# Altium PCB H05R2x.PcbDoc (part 1 of 2)
Units mil, origin at the board's own origin, x right, y up, seen from the top; angles counter-clockwise.
Board outline 2362.2 x 1363.78 mil, 4 copper layers (Top Layer, Layer 1, Layer 2, Bottom Layer); 78 components, 39 nets, 191 pads, 39 vias.
Unrouted connection lines stored in the file: 1.
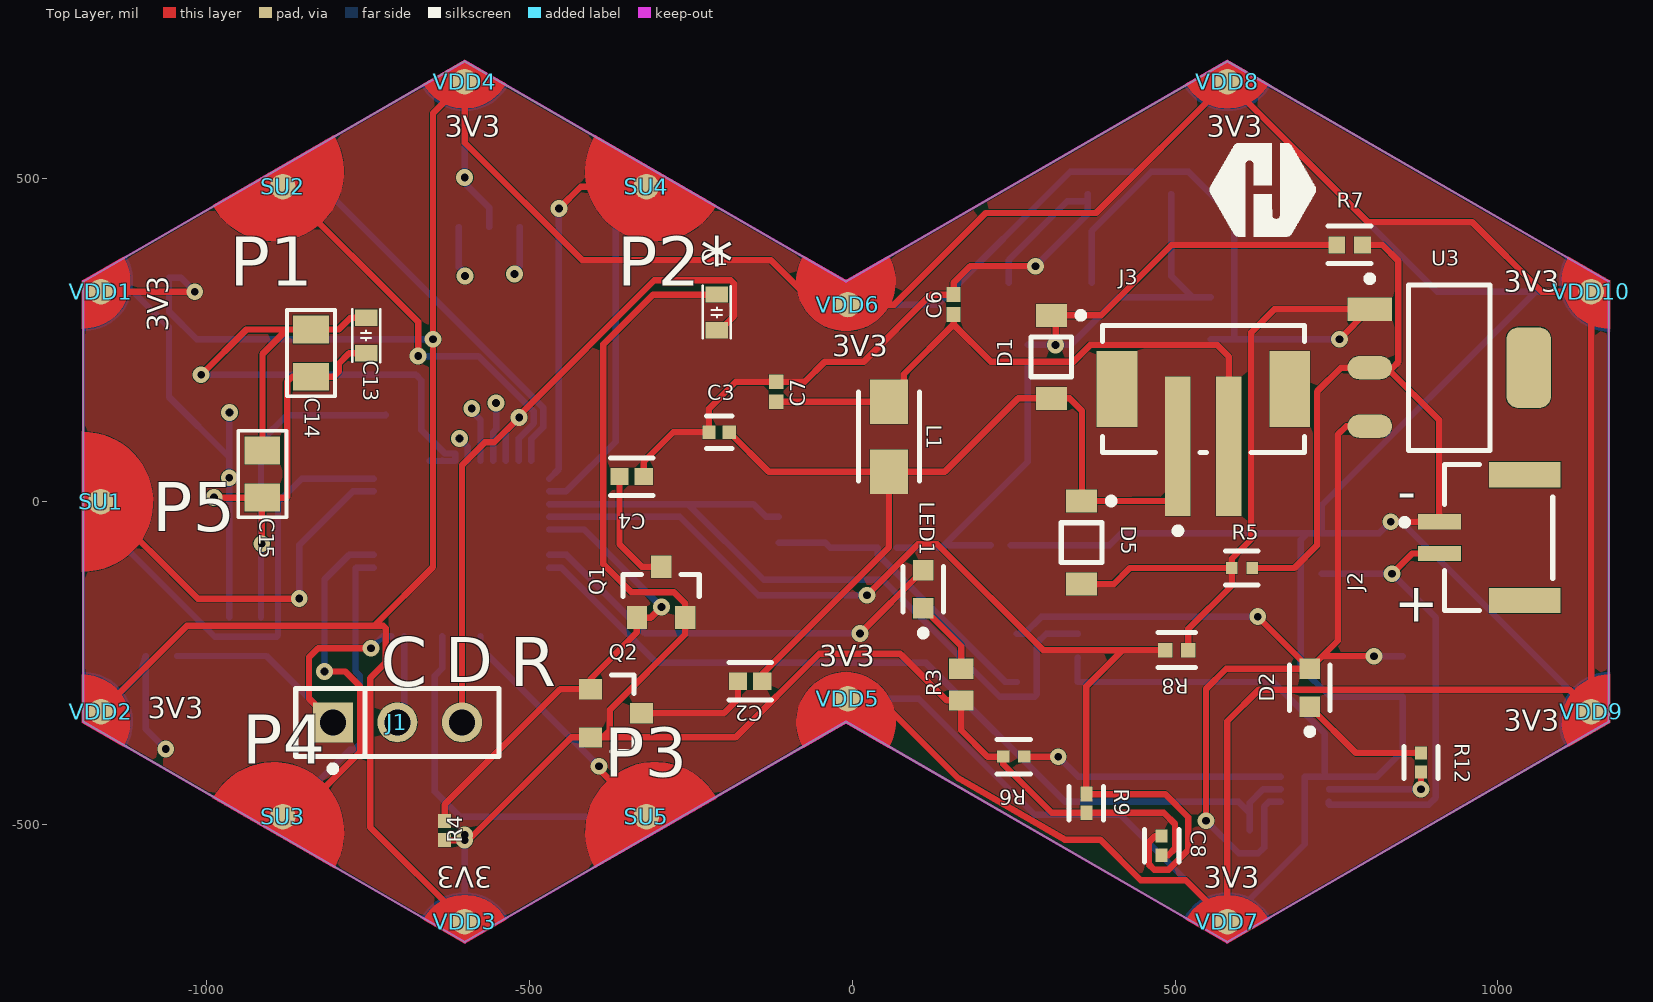
[diagram p0: Top Layer view]
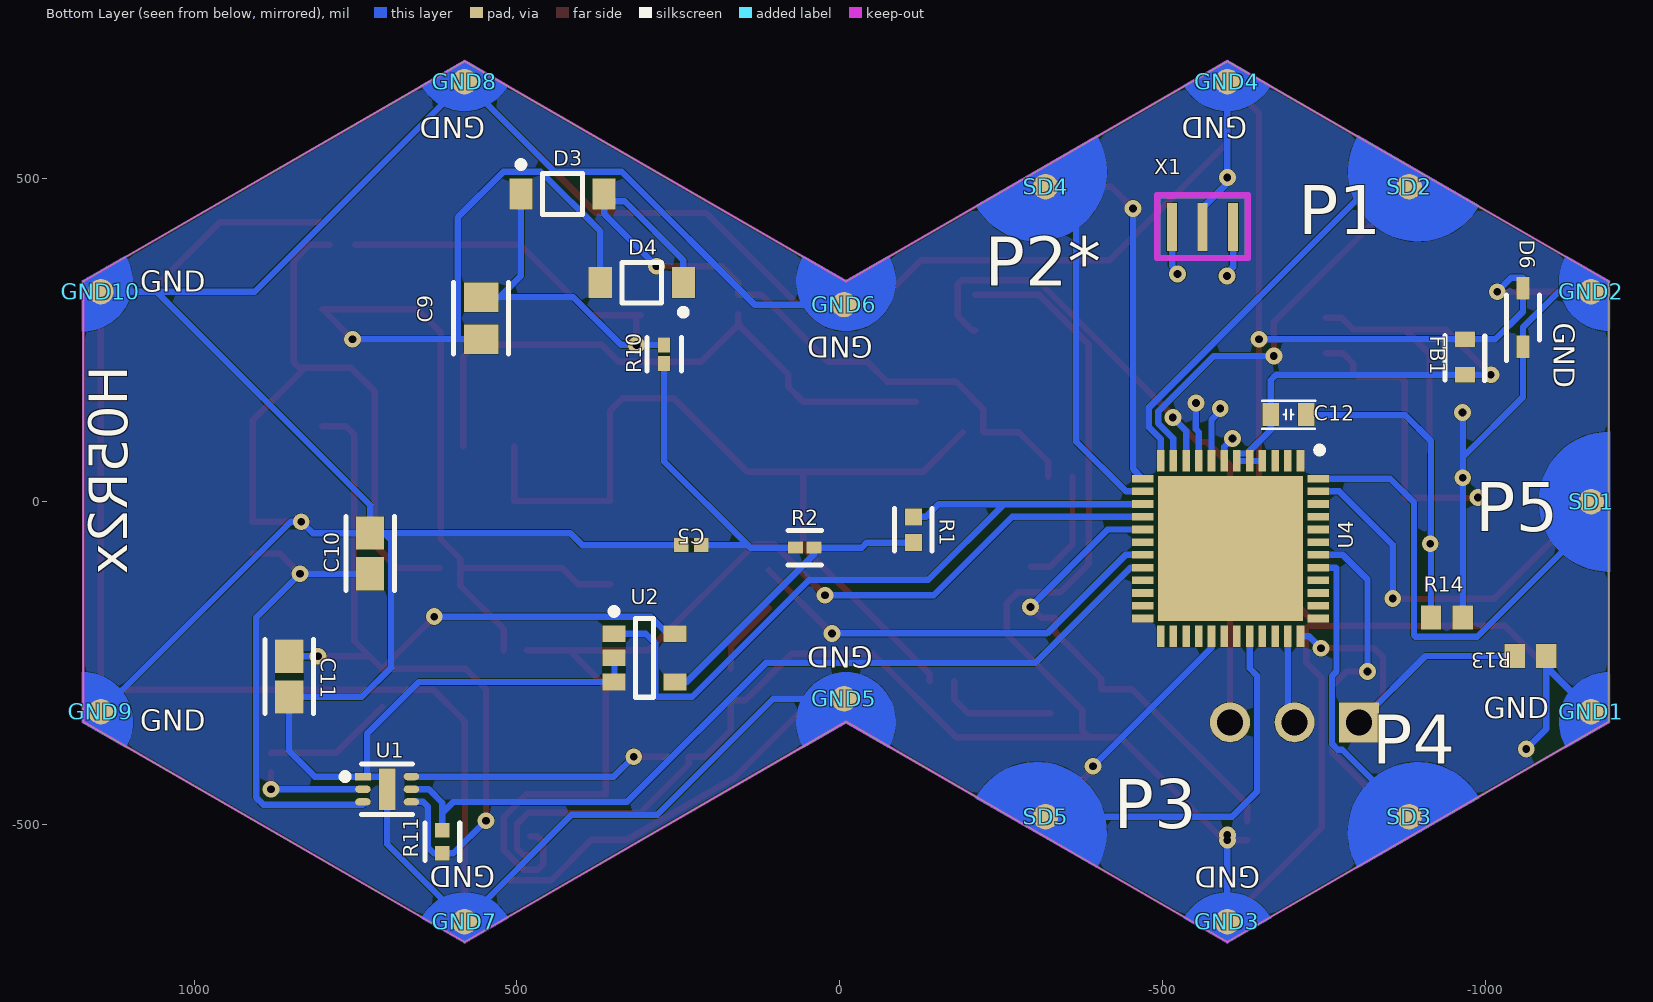
[diagram p1: Bottom Layer view, seen from below]
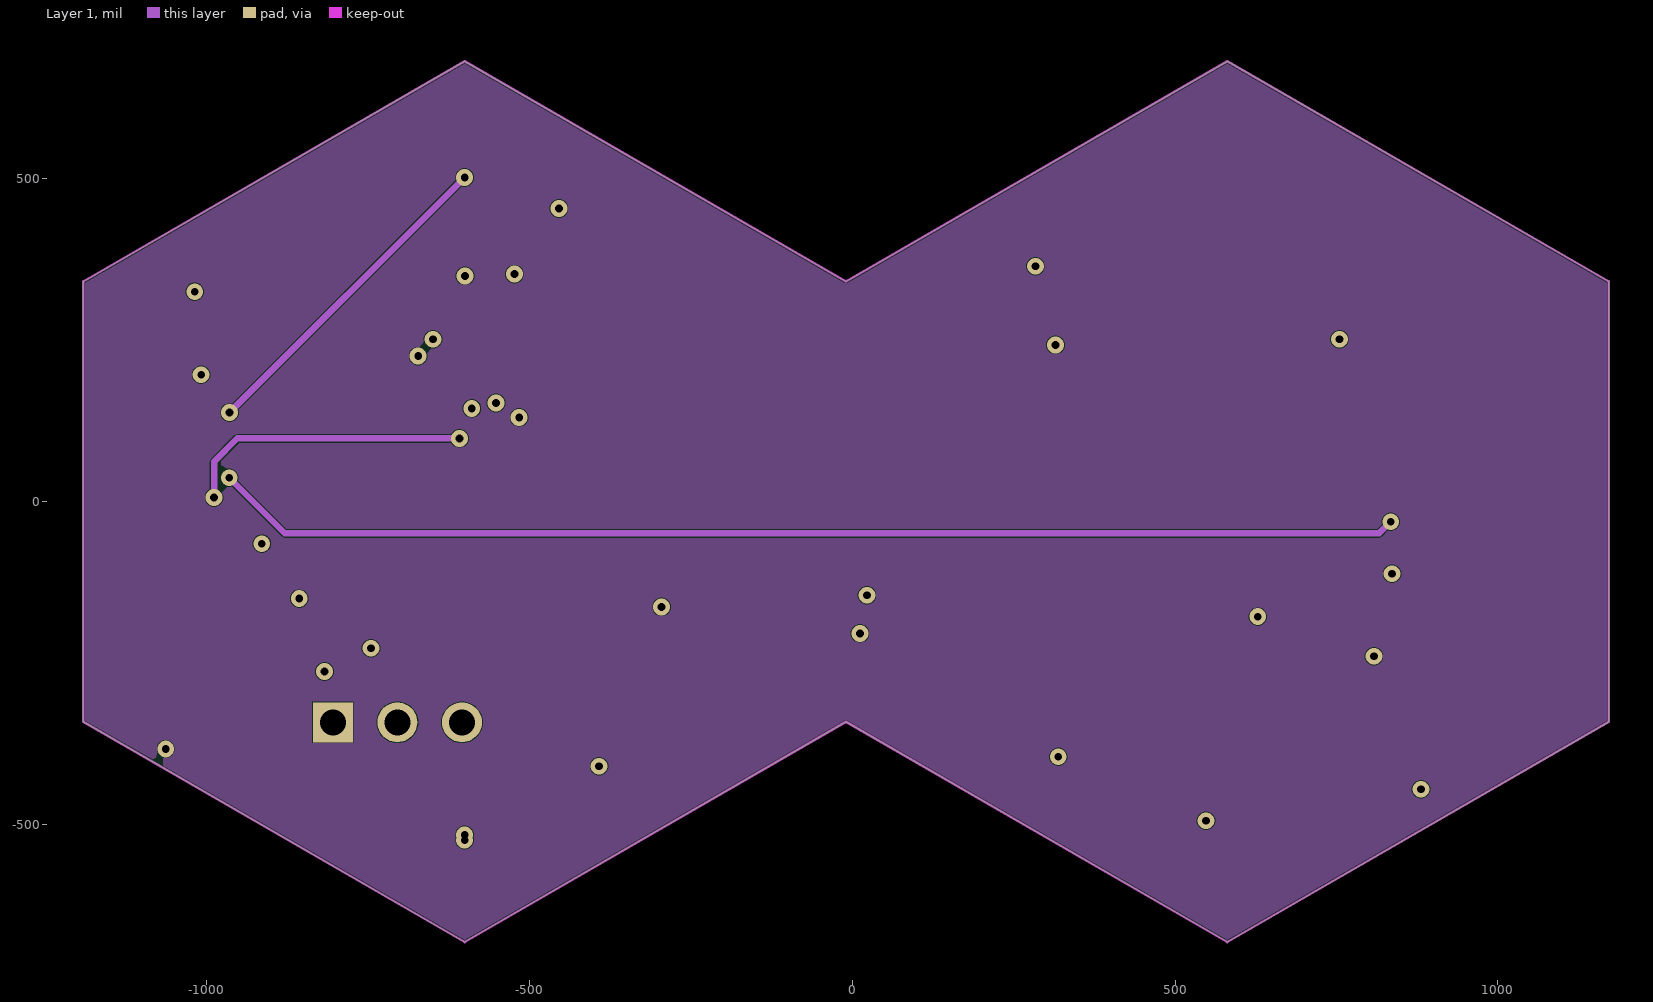
[diagram p2: Layer 1]
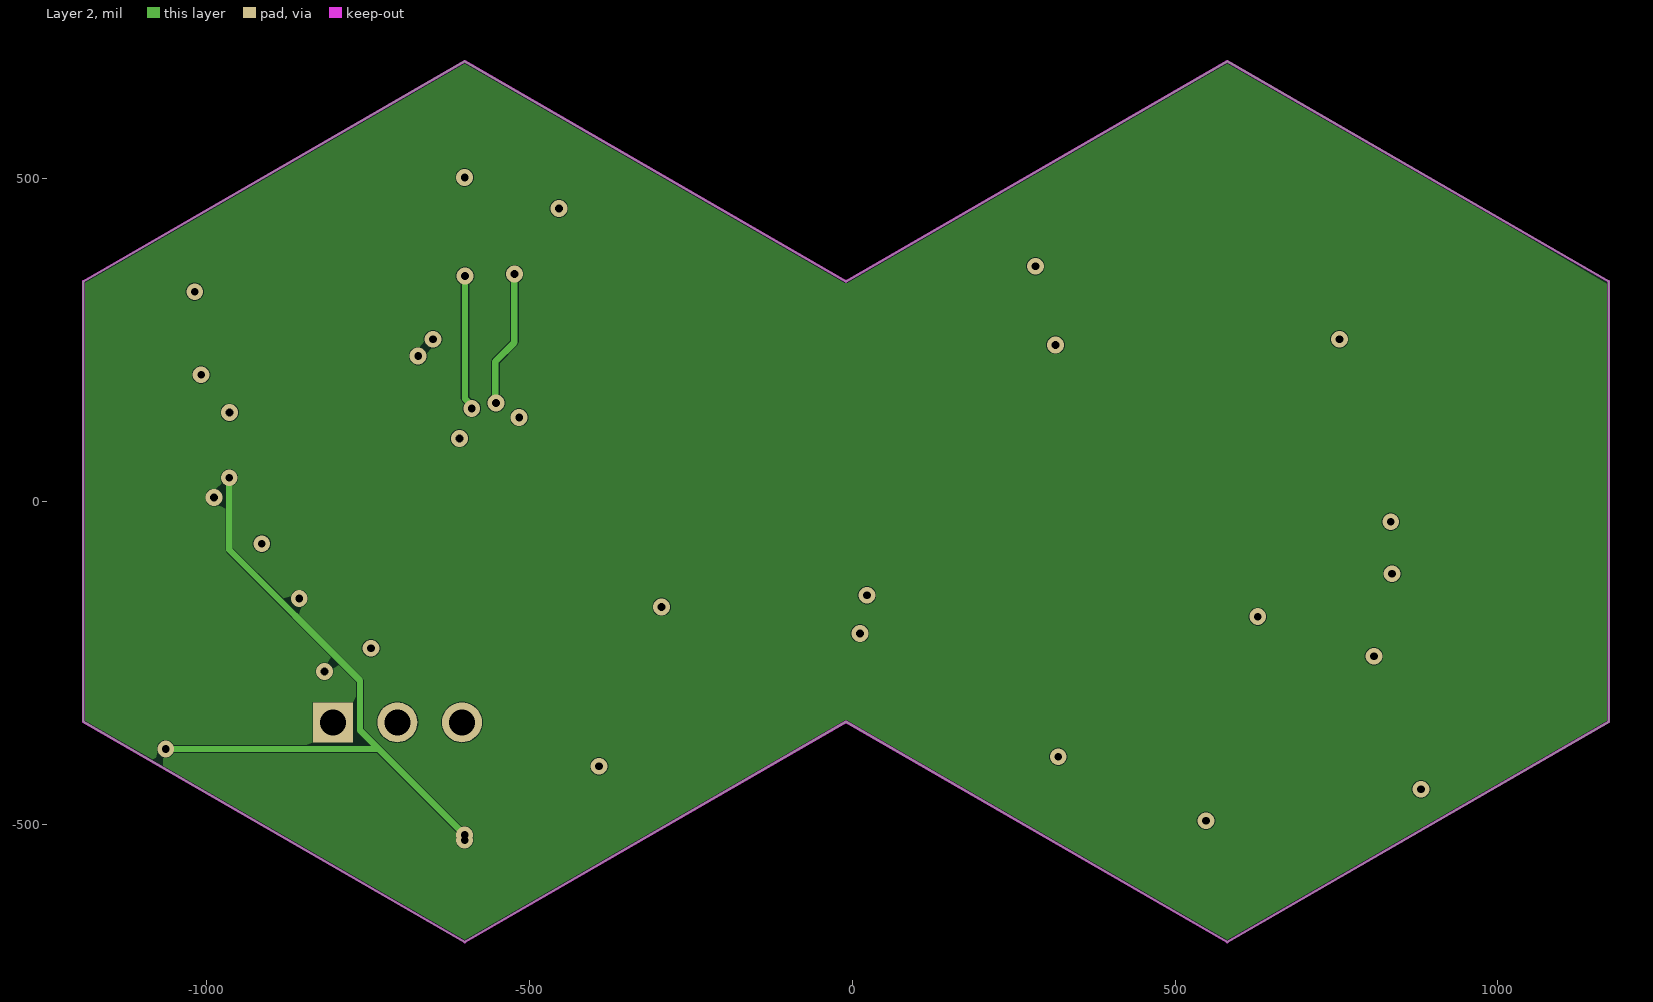
[diagram p3: Layer 2]
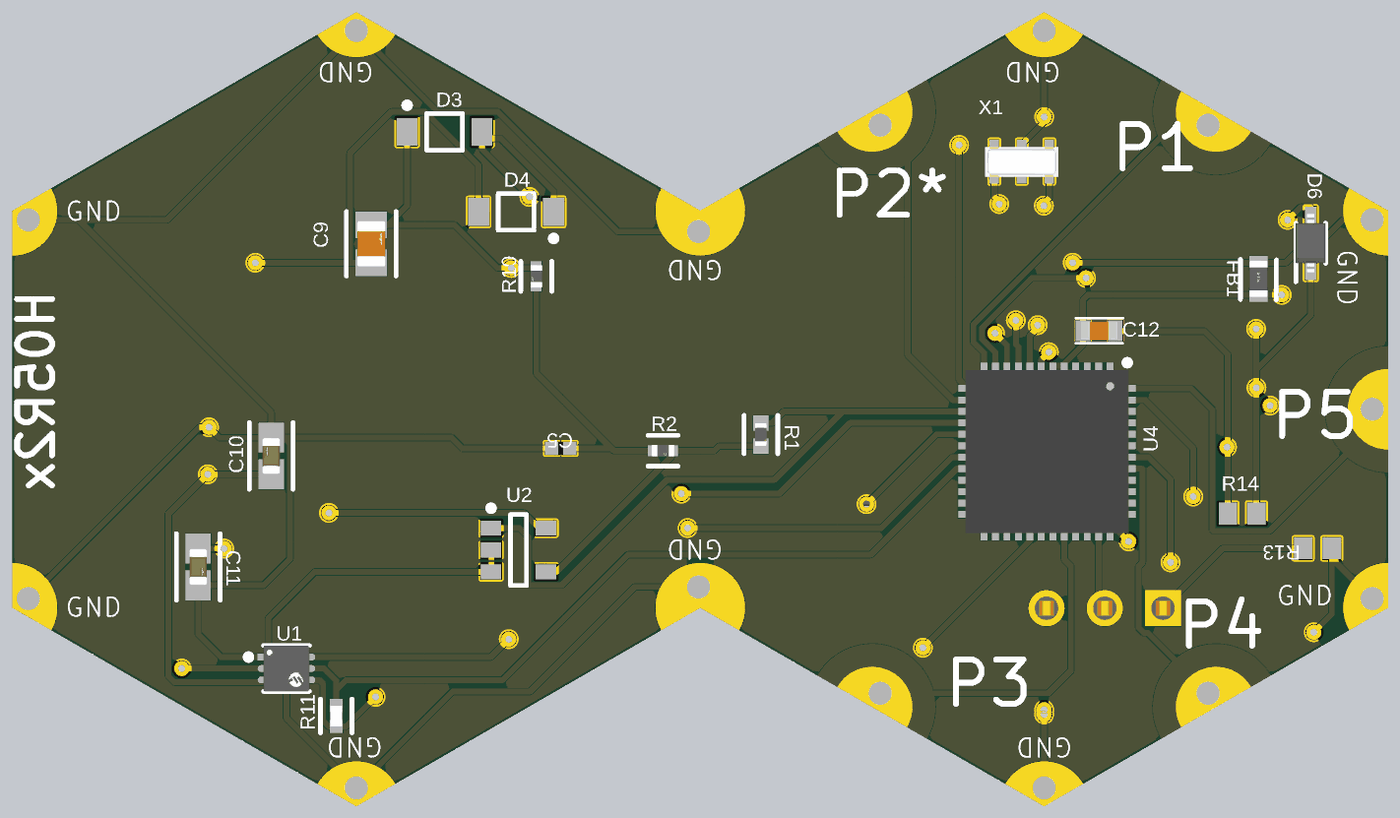
[diagram p4: 3D render of the assembled board from below, using the file's embedded part models]

## Layer stack, top to bottom
Top Solder: solder mask 0.4, Solder Resist, Dk 3.5
Top Layer: signal copper 1.4
Dielectric 2: dielectric 12.6, FR-4, Dk 4.8
Layer 1: signal copper 1.4
Dielectric 1: dielectric 12.6, FR-4, Dk 4.8
Layer 2: signal copper 1.4
Dielectric 3: dielectric 12.6, FR-4, Dk 4.8
Bottom Layer: signal copper 1.4
Bottom Solder: solder mask 0.4, Solder Resist, Dk 3.5

## Board outline
-1190.55,-340.94 -600,-681.89 -9.45,-340.94 581.1,-681.89 1171.65,-340.94 1171.65,340.94 581.1,681.89 -9.45,340.94 -600,681.89 -1190.55,340.94

## Design rules (kind name [scope] priority, off if disabled: settings)
Clearance [All] p1: gap=1 ignorepadtopadclearanceinfootprint=TRUE
PolygonConnect [All] p1: connectstyle=Relief reliefconductorwidth=10 reliefentries=4 polygonreliefangle="90 Angle" airgapwidth=10
RoutingVias [All] p1: holewidth=12 width=26 viastyle="Through Hole" minholewidth=12 minwidth=26 maxholewidth=12 maxwidth=26
SilkToSilkClearance [All] p1: silktosilkclearance=0.5
SilkToSolderMaskClearance [IsPad] p1: minsilkscreentomaskgap=5 clearancetoexposedcopper=TRUE
SolderMaskExpansion [All] p1: expansion=4 istentingtop=FALSE
SupplyNets "Schematic Supply Nets_5" [InNet('VREC')] p1: voltage=0.000
SupplyNets "Schematic Supply Nets_4" [InNet('+5')] p2: voltage=0.000
SupplyNets "Schematic Supply Nets_3" [InNet('GND')] p3: voltage=0.000
SupplyNets "Schematic Supply Nets_2" [InNet('VDDA')] p4: voltage=0.000
SupplyNets "Schematic Supply Nets_1" [InNet('VSSA')] p5: voltage=0.000
SupplyNets "Schematic Supply Nets" [InNet('VDD')] p6: voltage=0.000
Width [All] p1: maxlimit=10 minlimit=10 preferedwidth=10
28 further rules are at their usual default settings.

## Classes and differential pairs
component class "H05R2x_Frontend 1": C2 C3 C4 C5 C6 C7 C8 C9 C10 C11 D1 D2 D3 D4 D5 J2 J3 L1 Q1 Q2 R1 R2 R4 R5 R6 R7 R8 R9 R10 R11 R12 U1 U2 U3
component class H05R2x_Backend: C1 C12 C13 C14 C15 D6 FB1 GND1 GND2 GND3 GND4 GND5 GND6 GND7 GND8 GND9 GND10 J1 LED1 R3 R13 R14 SD1 SD2 SD3 SD4 SD5 SU1 SU2 SU3 SU4 SU5 U4 VDD1 VDD2 VDD3 VDD4 VDD5 VDD6 VDD7 VDD8 VDD9 VDD10 X1

## Components (designator, comment, footprint, x,y, rotation, side; value= is the part's Value field where it differs from the comment)
C1 "CL10B104KA8NNNC" C0603 -209.52,293.08 r270 top value=100nF
C2 "47pF  ±5% 100V 0402" FP-GQM155-0_05-IPC_A -157.98,-278.03 r180 top
C3 "470pF 50V 5% 0402" FP-C0402-BB-MFG -205.93,107.42 r0 top value="470 pF"
C4 "47pF  ±5% 100V 0402" FP-GQM155-0_05-IPC_A -341.35,38.73 r180 top
C5 "10nF 16V 0402" CAPC1005X60X26LL10T16 230.12,-67.26 r0 bottom
C6 "22pF 100V ±5% 0402" CAPC1005X61X26LL10T16 157.16,305.3 r90 top
C7 "22pF 100V ±5% 0402" CAPC1005X61X26LL10T16 -117.61,170.22 r90 top
C8 "1.0uF 10% 25V 0402" FP-GRM155-0_05-IPC_C 479.35,-532.67 r270 top
C9 "10uF 16V 10% 0402" FP-GRM21B-0_1-IPC_B 555.48,284.14 r90 bottom
C10 "4.7uF 10%, 16V 0603" FP-GRM188-0_2-IPC_A 727.33,-80.17 r90 bottom
C11 "4.7uF 10% 16V 0603" FP-GRM188-0_2-IPC_A 852.59,-270.78 r270 bottom
C12 "CL10B104KA8NNNC" C0603 -694.54,134.9 r0 bottom value=100nF
C13 "CL10B104KA8NNNC" C0603 -752.53,257.31 r90 top value=100nF
C14 "CL21X475KAQNNNE" C0805 -837.88,230.08 r270 top value=4.7µF
C15 "CC0805KKX7R7BB105" C0805 -913.1,42.8 r90 top value=1µF
D1 "MBR0540T1G" ONSC-SOD-123-2-425-04_V 308.5,224.18 r270 top
D2 "LED RED 0603" FP-6_541-5092_01-4-MFG 708.82,-288.13 r90 top
D3 "MBR0540T1G" ONSC-SOD-123-2-425-04_V 429.57,476.4 r180 bottom
D4 "MBR0540T1G" ONSC-SOD-123-2-425-04_V 306.71,339.01 r0 bottom
D5 "MBR0540T1G" ONSC-SOD-123-2-425-04_V 355.38,-63.33 r270 top
D6 "CDSOD323-T03SC" SOD2513X114N -1057.77,285.15 r90 bottom value=200pF
FB1 "MMZ1608Y300B" FP-MMZ1608-0_8-MFG -968.08,224.04 r270 bottom
GND1 "HEXABIT_UART_PORT" HEXABIT_POWER_PORT_D -1163.26,-325.2 r150 top
GND2 "HEXABIT_UART_PORT" HEXABIT_POWER_PORT_D -1163.26,325.2 r90 top
GND3 "HEXABIT_UART_PORT" HEXABIT_POWER_PORT_D -600,-650.39 r210 top
GND4 "HEXABIT_UART_PORT" HEXABIT_POWER_PORT_D -600,650.39 r30 top
GND5 "HEXABIT_UART_PORT" HEXABIT_POWER_PORT_D_300L -6.61,-305.2 r90 top
GND6 "HEXABIT_UART_PORT" HEXABIT_POWER_PORT_D_300R -6.61,305.2 r90 top
GND7 "HEXABIT_UART_PORT" HEXABIT_POWER_PORT_D 581.1,-650.39 r210 top
GND8 "HEXABIT_UART_PORT" HEXABIT_POWER_PORT_D 581.1,650.39 r30 top
GND9 "HEXABIT_UART_PORT" HEXABIT_POWER_PORT_D 1144.49,-325.2 r270 top
GND10 "HEXABIT_UART_PORT" HEXABIT_POWER_PORT_D 1144.49,325.2 r330 top
J1 "TSW-103-14-G-S" FP-TSW-103-14-G-S-MFG -704.08,-341.74 r0 top
J2 "BM02B-GHS-TBT(LF)(SN)" FP-BM02B-GHS-TBT_LF_SN-MFG 1001.24,-55.65 r90 top
J3 "B2B-PH-SM4-TBT(LF)(SN)" FP-B2B-PH-SM4-TBT_LF_SN-MFG 543.91,174.41 r0 top
L1 "47μH ±5% 10.4Ω 55mA 1206" FP-LQH31CN_03-MFG 57.06,100.71 r270 top
LED1 "VLMS1300-GS08" FP-6_541-5092_01-4-MFG 110.16,-135.53 r90 top
Q1 "2N7002-7-F" FP-SOT23-MFG -295.76,-140.13 r90 top
Q2 "2N7002-7-F" FP-SOT23-MFG -365.56,-327.67 r0 top
R1 "20kΩ, 1%, 0402" FP-TFCR0402-IPC_A -113.68,-43.5 r270 bottom
R2 "1kΩ ±1% 0402" FP-RNCP0402-IPC_C 54.45,-71.18 r0 bottom
R3 "Manufacturer Part Number" R0603 168.94,-283.17 r90 top value=270Ω
R4 "10kΩ, 1% 0402" RESC1005X40X25LL10T10 -631.01,-509.49 r90 top
R5 "1.2kΩ 1% 0402" FP-MCS0402-IPC_C 603.69,-102.69 r0 top
R6 "3.9kΩ ±1% 0402" FP-RN73R1E-IPC_C 250.15,-394.87 r180 top
R7 "0.1Ω 1% 0402" FP-CSR0402-IPC_A 770.25,397.69 r0 top
R8 "11kΩ 1% 0402" FP-CRCW0402-e3-IPC_B 502.89,-229.8 r180 top
R9 "1kΩ ±1% 0.1W 0402" FP-RNCP0402-IPC_C 362.7,-467.19 r270 top
R10 "1kΩ ±1% 0402" FP-RNCP0402-IPC_C 272.06,228.28 r90 bottom
R11 "11kΩ, 1%, 0402" FP-CRCW0402-e3-IPC_B 615.65,-526.84 r90 bottom
R12 "1kΩ ±1% 0402" FP-AC0402-IPC_C 880.91,-403.94 r270 top
R13 "Manufacturer Part Number" R0603 -1069.36,-238.97 r180 bottom value=10kΩ
R14 "Manufacturer Part Number" R0603 -939.95,-179.12 r0 bottom
SD1 "HEXABIT_UART_PORT" HEXABIT_UART_PORT_D -1163.39,0 r150 top
SD2 "HEXABIT_UART_PORT" HEXABIT_UART_PORT_D -881.5,487.8 r90 top
SD3 "HEXABIT_UART_PORT" HEXABIT_UART_PORT_D -881.5,-487.8 r210 top
SD4 "HEXABIT_UART_PORT" HEXABIT_UART_PORT_D -318.5,487.8 r30 top
SD5 "HEXABIT_UART_PORT" HEXABIT_UART_PORT_D -318.5,-487.8 r270 top
SU1 "HEXABIT_UART_PORT" HEXABIT_UART_PORT_U -1163.39,0 r150 top
SU2 "HEXABIT_UART_PORT" HEXABIT_UART_PORT_U -881.5,487.8 r90 top
SU3 "HEXABIT_UART_PORT" HEXABIT_UART_PORT_U -881.5,-487.8 r210 top
SU4 "HEXABIT_UART_PORT" HEXABIT_UART_PORT_U -318.5,487.8 r30 top
SU5 "HEXABIT_UART_PORT" HEXABIT_UART_PORT_U -318.5,-487.8 r270 top
U1 "MCP73830LT-0AAI/MYY" FP-C04-078-IPC_C 701.06,-445.31 r180 bottom
U2 "MCP6001T-E/OT" SOT-23-OT5_L 302.53,-241.82 r180 bottom
U3 "MCP1755ST-5002E/DB" FP-C04-032-IPC_B 924.68,207.43 r0 top
U4 "STM32G0B1CEU6" QFN50P700X700X65-49N-D -604.97,-72.6 r270 bottom
VDD1 "HEXABIT_UART_PORT" HEXABIT_POWER_PORT_U -1163.26,325.2 r150 top
VDD2 "HEXABIT_UART_PORT" HEXABIT_POWER_PORT_U -1163.26,-325.2 r210 top
VDD3 "HEXABIT_UART_PORT" HEXABIT_POWER_PORT_U -600,-650.39 r270 top
VDD4 "HEXABIT_UART_PORT" HEXABIT_POWER_PORT_U -600,650.39 r90 top
VDD5 "HEXABIT_UART_PORT" HEXABIT_POWER_PORT_U_300L -6.61,-305.2 r90 top
VDD6 "HEXABIT_UART_PORT" HEXABIT_POWER_PORT_U_300R -6.61,305.2 r90 top
VDD7 "HEXABIT_UART_PORT" HEXABIT_POWER_PORT_U 581.1,-650.39 r270 top
VDD8 "HEXABIT_UART_PORT" HEXABIT_POWER_PORT_U 581.1,650.39 r90 top
VDD9 "HEXABIT_UART_PORT" HEXABIT_POWER_PORT_U 1144.49,-325.2 r330 top
VDD10 "HEXABIT_UART_PORT" HEXABIT_POWER_PORT_U 1144.49,325.2 r30 top
X1 "CSTCE8M00G52Z-R0" XTALL_CSTCE8M00G52 -561.6,425.35 r90 bottom value=10pF

## Footprints (in the part's own frame and the unit in brackets; to place one, negate y for a bottom-side part, rotate by r counter-clockwise, add the part's x,y. Pads: shape width x height; smd on the part's side, far side on the other; paste and mask are expansions set on the pad)
C0603 [mm]
  rect 0.64x0.89 smd mask+0.05: 1(-0.7,0) 2(0.7,0)
  silkscreen extent -1.05,-0.55 1.02,0.55, body extent -0.9,-0.5 0.9,0.5, height 1.4
C0805 [mil]
  rect 43x55 smd: 1(-36.5,0) 2(36.5,0)
  silkscreen extent -67,-37 67,37, body extent -39,-24 40,25, height 31
CAPC1005X60X26LL10T16 [mm] "Chip Capacitor, 2-Leads, Body 1.00x0.50mm, IPC High Density"
  rect 0.58x0.54 smd: 1(-0.39,0) 2(0.39,0)
  body extent -0.55,-0.3 0.55,0.3, height 0.6
CAPC1005X61X26LL10T16 [mm] "Chip Capacitor, 2-Leads, Body 1.02x0.51mm, IPC High Density"
  rect 0.58x0.56 smd: 1(-0.39,0) 2(0.39,0)
  body extent -0.56,-0.31 0.56,0.31, height 0.61
FP-6_541-5092_01-4-MFG [mm]
  rect 0.8x0.8 smd paste+0 mask+0: 1(-0.75,0) 2(0.75,0)
  silkscreen extent -1.85,-0.8 0.9,0.8, body extent -1.25,-0.6 1.25,0.6, height 0.25
FP-AC0402-IPC_C [mil]
  rect 20.29x18.6 smd paste+0 mask+0: 1(-14.91,0) 2(14.9,0)
  silkscreen extent -25,-27 25,27, body extent -29,-15 29,15, height 10
FP-B2B-PH-SM4-TBT_LF_SN-MFG [mm]
  rect 1x5.5 smd paste+0 mask+0: 1(-1,-2.25) 2(1,-2.25)
  rect 1.6x3 smd paste+0 mask+0: 3(-3.4,0) 4(3.4,0)
  silkscreen extent -3.98,-5.7 3.98,2.5, body extent -4.3,-5.1 4.3,2.6, height 0.25
FP-BM02B-GHS-TBT_LF_SN-MFG [mm]
  rect 0.6x1.7 smd paste+0 mask+0: 1(0.625,2.325) 2(-0.625,2.325)
  rect 1x2.8 smd paste+0 mask+0: 3(-2.475,-1.025) 4(2.475,-1.025)
  silkscreen extent -2.87,-2.13 2.88,3.82, body extent -3.08,-2.52 3.08,3.27, height 0.25
FP-C04-032-IPC_B [mm]
  rect 1.754x0.913 smd paste+0 mask+0: 1(-3.125,2.3)
  rrect100% 1.754x0.913 smd paste+0 mask+0: 2(-3.125,0) 3(-3.125,-2.3)
  rrect52% 1.754x3.172 smd paste+0 mask+0: 4(3.125,0)
  silkscreen extent -3.25,-3.25 1.6,3.62
FP-C04-078-IPC_C [mm]
  rect 0.611x0.292 smd paste+0 mask+0: 1(-0.951,0.5)
  rrect100% 0.611x0.292 smd paste+0 mask+0: 2(-0.951,0) 3(-0.951,-0.5) 4(0.951,-0.5) 5(0.951,0) 6(0.951,0.5)
  rect 0.65x1.65 smd paste-1000 mask+0: 7(0,0)
  silkscreen extent -1.78,-1 1,1, body extent -1,-1 1,1, height 0.8
FP-C0402-BB-MFG [mm]
  rect 0.52x0.52 smd paste+0 mask+0: 1(-0.4,0) 2(0.4,0)
  silkscreen extent -0.5,-0.64 0.5,0.63, body extent -0.8,-0.4 0.8,0.4, height 0.25
FP-CRCW0402-e3-IPC_B [mil]
  rect 22.37x22.54 smd paste+0 mask+0: 1(-17.8,0) 2(17.8,0)
  silkscreen extent -29,-27 29,27, body extent -35,-17 35,17, height 10
FP-CSR0402-IPC_A [mil]
  rect 26.19x26.48 smd paste+0 mask+0: 1(-19.83,0) 2(19.82,0)
  silkscreen extent -33,-29 33,29, body extent -41,-21 41,21, height 10
FP-GQM155-0_05-IPC_A [mil]
  rect 28.16x26.48 smd paste+0 mask+0: 1(-18.84,0) 2(18.84,0)
  silkscreen extent -33,-29 33,29, body extent -41,-21 41,21, height 10
FP-GRM21B-0_1-IPC_B [mil]
  rect 45.58x53.63 smd paste+0 mask+0: 1(-32.57,0) 2(32.57,0)
  silkscreen extent -55,-43 55,43, body extent -39,-25 39,25, height 53
FP-GRM155-0_05-IPC_C [mil]
  rect 20.29x18.6 smd paste+0 mask+0: 1(-14.9,0) 2(14.9,0)
  silkscreen extent -25,-27 25,27, body extent -29,-15 29,15, height 10
FP-GRM188-0_2-IPC_A [mil]
  rect 51.38x43.55 smd paste+0 mask+0: 1(-31.52,0) 2(31.52,0)
  silkscreen extent -57,-38 57,38, body extent -31,-16 31,16, height 39
FP-LQH31CN_03-MFG [mm]
  rect 1.75x1.5 smd paste+0 mask+0: 1(-1.375,0) 2(1.375,0)
  silkscreen extent -1.75,-1.2 1.75,1.2, body extent -1.6,-0.8 1.6,0.8, height 2
FP-MCS0402-IPC_C [mil]
  rect 18.32x18.6 smd paste+0 mask+0: 1(-15.89,0) 2(15.89,0)
  silkscreen extent -25,-27 25,27, body extent -29,-15 29,15, height 10
FP-MMZ1608-0_8-MFG [mm]
  rect 0.6x0.8 smd paste+0 mask+0: 1(-0.7,0) 2(0.7,0)
  silkscreen extent -0.85,-0.79 0.93,0.78, body extent -0.8,-0.4 0.8,0.4, height 0.95
FP-RN73R1E-IPC_C [mil]
  rect 19.2x18.6 smd paste+0 mask+0: 1(-16.3,0) 2(16.3,0)
  silkscreen extent -26,-27 26,27, body extent -30,-15 30,15, height 10
FP-RNCP0402-IPC_C [mil]
  rect 22.88x18.6 smd paste+0 mask+0: 1(-14.39,0) 2(14.39,0)
  silkscreen extent -26,-27 26,27, body extent -20,-10 20,10, height 14
FP-SOT23-MFG [mm]
  rect 0.9x0.8 smd paste+0 mask+0: 1(-1,0.95) 2(-1,-0.95) 3(1,0)
  silkscreen extent -0.17,-1.5 0.7,1.5, body extent -1.55,-1.6 1.55,1.6, height 0.25
FP-TFCR0402-IPC_A [mil]
  rect 26.19x26.48 smd paste+0 mask+0: 1(-19.83,0) 2(19.83,0)
  silkscreen extent -33,-29 33,29, body extent -20,-10 20,10, height 14
FP-TSW-103-14-G-S-MFG [mm]
  rect 1.57x1.57 hole 1.02 paste-2539.97 mask+0: 1(-2.54,0)
  round 1.57 hole 1.02 paste-2539.97 mask+0: 2(0,0) 3(2.54,0)
  silkscreen extent -4,-1.95 4,1.33, body extent -4.1,-1.44 4.1,1.44, height 0.25
HEXABIT_POWER_PORT_D [mm]
  rrect100% 1x1 smd far side paste+0: Pwr_D(0,0)
  Bottom Layer region: 1.418,-0.978 0.633,-1.25 -0.194,-1.171 -0.914,-0.754 -1.394,-0.076 -1.549,0.74 -1.549,0.74 0.429,0.74
HEXABIT_POWER_PORT_D_300L [mm]
  rrect100% 1x1 smd far side paste+0: Pwr_D(0,0)
  Bottom Layer region: 1.041,0.122 0.886,-0.694 0.406,-1.372 -0.314,-1.788 -1.141,-1.868 -1.926,-1.596 -1.926,-1.596 -0.937,0.122
  Bottom Layer region: 1.041,0.022 0.886,0.838 0.406,1.516 -0.314,1.933 -1.141,2.012 -1.926,1.74 -1.926,1.74 -0.937,0.022
HEXABIT_POWER_PORT_D_300R [mm]
  rrect100% 1x1 smd far side paste+0: Pwr_D(0,0)
  Bottom Layer region: 1.926,-1.596 1.141,-1.868 0.314,-1.788 -0.406,-1.372 -0.886,-0.694 -1.041,0.122 -1.041,0.122 0.937,0.122
  Bottom Layer region: -1.041,0.022 -0.886,0.838 -0.406,1.516 0.314,1.933 1.141,2.012 1.926,1.74 1.926,1.74 0.937,0.022
HEXABIT_POWER_PORT_U [mm]
  rrect100% 1x1 smd paste+0: Pwr_U(0,0)
  Top Layer region: -0.081,-1.631 -0.68,-1.115 -1.01,-0.395 -1.01,0.395 -0.68,1.115 -0.081,1.631 -0.081,1.631 0.858,0
HEXABIT_POWER_PORT_U_300L [mm]
  rrect100% 1x1 smd paste+0: Pwr_U(0,0)
  Top Layer region: 1.041,0.022 0.886,0.838 0.406,1.516 -0.314,1.933 -1.141,2.012 -1.926,1.74 -1.926,1.74 -0.937,0.022
  Top Layer region: 1.041,0.122 0.886,-0.694 0.406,-1.372 -0.314,-1.788 -1.141,-1.868 -1.926,-1.596 -1.926,-1.596 -0.937,0.122
HEXABIT_POWER_PORT_U_300R [mm]
  rrect100% 1x1 smd paste+0: Pwr_U(0,0)
  Top Layer region: 1.926,-1.596 1.141,-1.868 0.314,-1.788 -0.406,-1.372 -0.886,-0.694 -1.041,0.122 -1.041,0.122 0.937,0.122
  Top Layer region: -1.041,0.022 -0.886,0.838 -0.406,1.516 0.314,1.933 1.141,2.012 1.926,1.74 1.926,1.74 0.937,0.022
HEXABIT_UART_PORT_D [mm]
  rrect100% 1x1 smd far side paste+0: UART_D(0,0)
  Bottom Layer region: 2.018,-2.008 0.84,-2.391 -0.386,-2.219 -1.413,-1.526 -2.032,-0.453 -2.117,0.782 -1.653,1.93 -0.731,2.758 -0.731,2.758
HEXABIT_UART_PORT_U [mm]
  rrect100% 1x1 smd paste+0: UART_U(0,0)
  Top Layer region: 2.018,-2.008 0.84,-2.391 -0.386,-2.219 -1.413,-1.526 -2.032,-0.453 -2.117,0.782 -1.653,1.93 -0.731,2.758 -0.731,2.758
ONSC-SOD-123-2-425-04_V [mm] "SOD, 2-Leads, Body 2.69x1.6mm"
  rect 0.91x1.22 smd: 1(-1.635,0) 2(1.635,0)
  silkscreen extent -1.76,-0.8 0.78,1.29, body extent -1.35,-0.8 1.35,0.8, height 1.35
QFN50P700X700X65-49N-D [mm]
  rect 0.85x0.3 smd mask+0: 1(-3.45,2.75) 2(-3.45,2.25) 3(-3.45,1.75) 4(-3.45,1.25) 5(-3.45,0.75) 6(-3.45,0.25) 7(-3.45,-0.25) 8(-3.45,-0.75) 9(-3.45,-1.25) 10(-3.45,-1.75) 11(-3.45,-2.25) 12(-3.45,-2.75) 25(3.45,-2.75) 26(3.45,-2.25) 27(3.45,-1.75) 28(3.45,-1.25) 29(3.45,-0.75) 30(3.45,-0.25) 31(3.45,0.25) 32(3.45,0.75) 33(3.45,1.25) 34(3.45,1.75) 35(3.45,2.25) 36(3.45,2.75)
  rect 0.3x0.85 smd mask+0: 13(-2.75,-3.45) 14(-2.25,-3.45) 15(-1.75,-3.45) 16(-1.25,-3.45) 17(-0.75,-3.45) 18(-0.25,-3.45) 19(0.25,-3.45) 20(0.75,-3.45) 21(1.25,-3.45) 22(1.75,-3.45) 23(2.25,-3.45) 24(2.75,-3.45) 37(2.75,3.45) 38(2.25,3.45) 39(1.75,3.45) 40(1.25,3.45) 41(0.75,3.45) 42(0.25,3.45) 43(-0.25,3.45) 44(-0.75,3.45) 45(-1.25,3.45) 46(-1.75,3.45) 47(-2.25,3.45) 48(-2.75,3.45)
  rect 5.7x5.7 smd mask+0: 49(0,0)
  silkscreen extent -4,3.37 -3.75,3.62, body extent -3.56,-3.56 3.56,3.56, height 0.61
R0603 [mm] "Chip Resistor, 2-Leads, Body 1.55x0.85mm, IPC Medium Density"
  rect 0.8x0.95 smd: 1(-0.625,0) 2(0.625,0)
  body extent -0.82,-0.48 0.82,0.48, height 0.5
RESC1005X40X25LL10T10 [mm] "Chip Resistor, 2-Leads, Body 1.00x0.50mm, IPC High Density"
  rect 0.55x0.5 smd: 1(-0.375,0) 2(0.375,0)
  body extent -0.55,-0.3 0.55,0.3, height 0.4
SOD2513X114N [mm]
  rect 0.9x0.5 smd: 1(-1.15,0) 2(1.15,0)
  silkscreen extent -1.69,-0.65 0.87,0.65, body extent -1.27,-0.65 1.27,0.65, height 1.14
SOT-23-OT5_L [mm] "SOT23, 5-Leads, Body 2.9x1.7mm, Pitch 0.95mm, Lead Span 2.8mm, IPC High Density"
  rect 0.9x0.65 smd: 1(-1.2,0.95) 2(-1.2,0) 3(-1.2,-0.95) 4(1.2,-0.95) 5(1.2,0.95)
  silkscreen extent -1.33,-1.55 0.35,1.95, body extent -0.9,-1.55 0.9,1.55, height 1.45
XTALL_CSTCE8M00G52 [mm]
  rect 1.9x0.4 smd: P$1(0,1.2) P$2(0,0) P$3(0,-1.2)
  Top Layer keep-out lines w0.254: -1.219,-1.778 1.245,-1.778 1.245,1.778 -1.219,1.778 -1.219,-1.778
  body extent -0.67,-1.6 0.64,1.6, height 0.8

## Part data
C1 C12 C13: library part "generic Capacitor", "Ceramic Capacitor, Multilayer, Ceramic, 25V, 10% +Tol, 10% -Tol, X7R, +-15% TC, 100nF, Surface Mount, 0603 inch", Case Code (Imperial)=0603, Case Code (Metric)=1608, Dielectric=X7R, Dielectric Material=Ceramic, Manufacturer="Samsung Electro-Mechanics", Max Operating Temperature=125°C, Min Operating Temperature=-55°C, Tolerance=10%, Voltage=25V, Case/Package=0603, Category="Ceramic Capacitors", China RoHS=Compliant, ComponentLink1Description=https://datasheet.octopart.com:443/CL10B104KA8NNNC-Samsung-Electro-Mechanics-datasheet-137745067.pdf?src-supplier=Newark, ComponentLink1URL=https://datasheet.octopart.com:443/CL10B104KA8NNNC-Samsung-Electro-Mechanics-datasheet-137745067.pdf?src-supplier=Newark, ComponentLink2Description=https://datasheet.octopart.com:443/CL10B104KA8NNNC-Samsung-Electro-Mechanics-datasheet-181551448.pdf?src-supplier=Newark, ComponentLink2URL=https://datasheet.octopart.com:443/CL10B104KA8NNNC-Samsung-Electro-Mechanics-datasheet-181551448.pdf?src-supplier=Newark, ComponentLink3Description=https://datasheet.octopart.com/CL10B104KA8NNNC-Samsung-Electro-Mechanics-datasheet-8324245.pdf, ComponentLink3URL=https://datasheet.octopart.com/CL10B104KA8NNNC-Samsung-Electro-Mechanics-datasheet-8324245.pdf, ComponentLink4Description=https://datasheet.octopart.com/CL10B104KA8NNNC-Samsung-Electro-Mechanics-datasheet-97040617.pdf, ComponentLink4URL=https://datasheet.octopart.com/CL10B104KA8NNNC-Samsung-Electro-Mechanics-datasheet-97040617.pdf, ComponentLink5Description=https://datasheet.octopart.com/General-Multilayer-Ceramic-Capacitors-Samsung-datasheet-family-111.pdf, ComponentLink5URL=https://datasheet.octopart.com/General-Multilayer-Ceramic-Capacitors-Samsung-datasheet-family-111.pdf, ComponentLink6Description=https://datasheet.octopart.com:443/CL10B104KA8NNNC-Samsung-Electro-Mechanics-datasheet-116890967.pdf?src-supplier=Future+Electronics, ComponentLink6URL=https://datasheet.octopart.com:443/CL10B104KA8NNNC-Samsung-Electro-Mechanics-datasheet-116890967.pdf?src-supplier=Future+Electronics, ComponentLink7Description=https://datasheet.octopart.com:443/CL10B104KA8NNNC-Samsung-Electro-Mechanics-datasheet-81461838.pdf?src-supplier=Future+Electronics, ComponentLink7URL=https://datasheet.octopart.com:443/CL10B104KA8NNNC-Samsung-Electro-Mechanics-datasheet-81461838.pdf?src-supplier=Future+Electronics, ComponentLink8Description=https://datasheet.octopart.com:443/CL10B104KA8NNNC-Samsung-datasheet-42770371.pdf?src-supplier=Future+Electronics, ComponentLink8URL=https://datasheet.octopart.com:443/CL10B104KA8NNNC-Samsung-datasheet-42770371.pdf?src-supplier=Future+Electronics, ComponentLink9Description=https://datasheet.octopart.com:443/CL10B104KA8NNNC-Samsung-datasheet-26589152.pdf?src-supplier=Future+Electronics, ComponentLink9URL=https://datasheet.octopart.com:443/CL10B104KA8NNNC-Samsung-datasheet-26589152.pdf?src-supplier=Future+Electronics, ComponentLink10Description=https://datasheet.octopart.com:443/CL10B104KA8NNNC-Samsung-Electro-Mechanics-datasheet-149136783.pdf?src-supplier=Future+Electronics, ComponentLink10URL=https://datasheet.octopart.com:443/CL10B104KA8NNNC-Samsung-Electro-Mechanics-datasheet-149136783.pdf?src-supplier=Future+Electronics, ComponentLink11Description=https://datasheet.octopart.com:443/CL10B104KA8NNNC-Samsung-datasheet-59220082.pdf?src-supplier=TME, ComponentLink11URL=https://datasheet.octopart.com:443/CL10B104KA8NNNC-Samsung-datasheet-59220082.pdf?src-supplier=TME, ComponentLink12Description=https://datasheet.octopart.com:443/CL10B104KA8NNNC-Samsung-Electro-Mechanics-datasheet-11756025.pdf?src-supplier=Arrow+Electronics, ComponentLink12URL=https://datasheet.octopart.com:443/CL10B104KA8NNNC-Samsung-Electro-Mechanics-datasheet-11756025.pdf?src-supplier=Arrow+Electronics, ComponentLink13Description=http://sigma.octopart.com:80/rohs_certificate/General-Multilayer-Ceramic-Capacitors-Samsung-family-110.pdf?src-supplier=Compliance+Statements, ComponentLink13URL=http://sigma.octopart.com:80/rohs_certificate/General-Multilayer-Ceramic-Capacitors-Samsung-family-110.pdf?src-supplier=Compliance+Statements, ComponentLink14Description=http://sigma.octopart.com:80/rohs_statement/General-Multilayer-Ceramic-Capacitors-Samsung-family-132.pdf?src-supplier=Compliance+Statements, ComponentLink14URL=http://sigma.octopart.com:80/rohs_statement/General-Multilayer-Ceramic-Capacitors-Samsung-family-132.pdf?src-supplier=Compliance+Statements, ComponentLink15Description=http://sigma.octopart.com:80/reach_statement/General-Multilayer-Ceramic-Capacitors-Samsung-family-133.pdf?src-supplier=Compliance+Statements, ComponentLink15URL=http://sigma.octopart.com:80/reach_statement/General-Multilayer-Ceramic-Capacitors-Samsung-family-133.pdf?src-supplier=Compliance+Statements, Depth=800µm, Height=800µm, Lead Free="Lead Free", Length=1.6mm, Library=Hexabitz, Lifecycle Status=Production, Manufacturer Part Number=CL10B104KA8NNNC, Material=Ceramic, Mounting Technology="Surface Mount", Number of Terminals=2, Pricing="4000=0.00265, 8000=0.00263, 16000=0.00262, 24000=0.00261, 32000=0.00259 (USD)", Radiation Hardening=No, REACH SVHC=Yes, RoHS=Compliant, Schedule B="8532240020, 8532240020|8532240020, 8532240020|8532240020|8532240020, 8532240020|8532240020|8532240020|8532240020", Stock=1332000, Supplier=Avnet, Supplier Part Number=CL10B104KA8NNNC, Thickness=889µm, Voltage Rating=25V, Voltage Rating (DC)=25V, Width=800µm
C2 C4: library part CMP-06035-010628-1, "Ceramic Capacitor 47pF  ±5% 100VDC C0G 0402 Paper T/R", Capacitance=47pF, Case/Package=0402, Dielectric=C0G, Max Operating Temperature=125°C, Min Operating Temperature=-55°C, Tolerance=5%, Voltage Rating=100V, Length=0.039inch, Mount="Surface Mount", Packaging="Tape and Reel", Thickness=0.022inch, Voltage Rating (DC)=100V, Width=0.02inch
C3: library part CMP-03020-013778-2, "C0402 470 pF C0G 0.05 50 V", Capacitance="470 pF", Manufacturer=Kemet, Manufacturer Part Number=C0402C471J5GAC, Package=C0402-BB, Temperature="-55°C to +125°C", Temperature Characteristic=C0G, Temperature Range High=+125°C, Temperature Range Low=-55°C, Tolerance=0.05, Voltage Rating="50 V", Automotive=No, Category=Cap, ComponentLink2Description=Datasheet, ComponentLink2URL=https://content.kemet.com/datasheets/KEM_C1002_X7R_SMD.pdf, Device Class L1="Passive Components", Device Class L2=Capacitors, Device Class L3="Ceramic Capacitors", Height=0.55mm, Ipc Land Pattern Name=CAPC10050X50, Lead Free=Yes, Material=Ceramic, Mouser Description="Cap Ceramic 470pF 50V C0G 5% Pad SMD 0402 125C Bulk", Octopart=https://octopart.com/c0402c471j5gac-kemet-29626191, RoHS=TRUE
C5: library part CMP-2008-02025-1, Manufacturer=Vitramon, Part Number=VJ0402Y103KXJAC
C6 C7: library part CMP-2008-02000-1, "VJ0402D220JXBAJ", Manufacturer=Vitramon, Part Number=VJ0402D220JXBAJ
C8: library part CMP-06035-057649-1, "Chip Multilayer Ceramic Capacitors for General Purpose, 0402, 1.0uF, B, 10%, 10%, 25V", Capacitance=1uF, Tolerance=10%, Voltage Rating (DC)=25V, Length=1mm, Thickness=500um, Width=500um
C9: library part CMP-2007-03503-2, "Chip Multilayer Ceramic Capacitors for General Purpose, 0805, 10uF, X6S, 22%, 10%, 16V", Capacitance=10uF, Case Code (Imperial)=0805, Case Code (Metric)=2012, Dielectric=X6S, Max Operating Temperature=105°C, Min Operating Temperature=-55°C, Package Quantity=3000, Tolerance=10%, Voltage=16V, Case/Package=0805, Depth=1.25mm, Height=1.25mm, Lead Free="Lead Free", Length=2mm, Mount="Surface Mount", Packaging="Tape and Reel", REACH SVHC="No SVHC", Termination=SMD/SMT, Thickness=0.053inch, Voltage Rating=16V, Voltage Rating (DC)=16V, Weight=0.000335oz, Width=0.049inch
C10 C11: library part CMP-06035-002362-1, "Chip Multilayer Ceramic Capacitors for General Purpose, 0603, 4.7uF, X7S, 22%, 10%, 16V", Capacitance=4.7uF, Dielectric=X7S, Tolerance=10%, Voltage Rating (DC)=16V, Length=1.6mm, Thickness=800um, Width=800um
C14: library part "generic Capacitor", "Ceramic Capacitor, Multilayer, Ceramic, 25V, 10% +Tol, 10% -Tol, X6S, +-22% TC, 4.7uF, Surface Mount, 0805 inch", Case Code (Imperial)=0805, Case Code (Metric)=2012, Dielectric=X6S, Dielectric Material=Ceramic, Manufacturer="Samsung Electro-Mechanics", Max Operating Temperature=105°C, Min Operating Temperature=-55°C, Supplier Part Number=1276-3033-1-ND, Tolerance=10%, Voltage Rating=25V, Case/Package=0805, Category="Ceramic Capacitors", China RoHS=Compliant, ComponentLink1Description=https://datasheet.octopart.com:443/CL21X475KAQNNNE-Samsung-Electro-Mechanics-datasheet-141347921.pdf?src-supplier=IHS, ComponentLink1URL=https://datasheet.octopart.com:443/CL21X475KAQNNNE-Samsung-Electro-Mechanics-datasheet-141347921.pdf?src-supplier=IHS, ComponentLink2Description=https://datasheet.octopart.com/CL21X475KAQNNNE-Samsung-Electro-Mechanics-datasheet-97040617.pdf, ComponentLink2URL=https://datasheet.octopart.com/CL21X475KAQNNNE-Samsung-Electro-Mechanics-datasheet-97040617.pdf, ComponentLink3Description=https://datasheet.octopart.com/CL21X475KAQNNNE-Samsung-Electro-Mechanics-datasheet-8324245.pdf, ComponentLink3URL=https://datasheet.octopart.com/CL21X475KAQNNNE-Samsung-Electro-Mechanics-datasheet-8324245.pdf, ComponentLink4Description=https://datasheet.octopart.com:443/CL21X475KAQNNNE-Samsung-datasheet-8326817.pdf?src-supplier=Future+Electronics, ComponentLink4URL=https://datasheet.octopart.com:443/CL21X475KAQNNNE-Samsung-datasheet-8326817.pdf?src-supplier=Future+Electronics, ComponentLink5Description=https://datasheet.octopart.com:443/CL21X475KAQNNNE-Samsung-datasheet-8326407.pdf?src-supplier=TME, ComponentLink5URL=https://datasheet.octopart.com:443/CL21X475KAQNNNE-Samsung-datasheet-8326407.pdf?src-supplier=TME, ComponentLink6Description=https://datasheet.octopart.com:443/CL21X475KAQNNNE-Samsung-Electro-Mechanics-datasheet-11541288.pdf?src-supplier=Arrow+Electronics, ComponentLink6URL=https://datasheet.octopart.com:443/CL21X475KAQNNNE-Samsung-Electro-Mechanics-datasheet-11541288.pdf?src-supplier=Arrow+Electronics, Depth=1.25mm, Height=1.4mm, Lead Free="Lead Free", Length=2mm, Library=Hexabitz, Lifecycle Status=Production, Manufacturer Part Number=CL21X475KAQNNNE, Material=Ceramic, Mounting Technology="Surface Mount", Number of Terminals=2, Packaging="Tape & Reel (TR)", Pricing="1=0.21, 10=0.124, 50=0.0886, 100=0.0778, 500=0.05972, 1000=0.05414 (USD)", REACH SVHC=Yes, RoHS=Compliant, Schedule B="8532240020, 8532240020|8532240020, 8532240020|8532240020|8532240020, 8532240020|8532240020|8532240020|8532240020", Stock=251721, Supplier=DigiKey, Thickness=1.397mm, Voltage Rating (DC)=25V, Width=1.25mm
C15: library part "generic Capacitor", "Ceramic Capacitor, Ceramic, 16V, 10% +Tol, 10% -Tol, X7R, 15% TC, 1uF, Surface Mount, 0805", Case Code (Imperial)=0805, Case Code (Metric)=2012, Dielectric=X7R, Dielectric Material=Ceramic, Manufacturer="Yageo Group", Manufacturer Package Identifier=CC0805-0.85, Max Operating Temperature=125°C, Min Operating Temperature=-55°C, Supplier Part Number=9937277, Tolerance=10%, Voltage Rating=16V, Case/Package=0805, Category="Ceramic Capacitors", China RoHS=Compliant, ComponentLink1Description=https://datasheet.octopart.com:443/CC0805KKX7R7BB105-Yageo-datasheet-177165144.pdf?src-supplier=IHS, ComponentLink1URL=https://datasheet.octopart.com:443/CC0805KKX7R7BB105-Yageo-datasheet-177165144.pdf?src-supplier=IHS, ComponentLink2Description=https://datasheet.octopart.com:443/CC0805KKX7R7BB105-Yageo-datasheet-78855689.pdf?src-supplier=Upverter, ComponentLink2URL=https://datasheet.octopart.com:443/CC0805KKX7R7BB105-Yageo-datasheet-78855689.pdf?src-supplier=Upverter, ComponentLink3Description=https://datasheet.octopart.com/CC0805KKX7R7BB105-Yageo-datasheet-10883670.pdf, ComponentLink3URL=https://datasheet.octopart.com/CC0805KKX7R7BB105-Yageo-datasheet-10883670.pdf, ComponentLink4Description=https://datasheet.octopart.com:443/CC0805KKX7R7BB105-Yageo-datasheet-140260305.pdf?src-supplier=SOS+electronic, ComponentLink4URL=https://datasheet.octopart.com:443/CC0805KKX7R7BB105-Yageo-datasheet-140260305.pdf?src-supplier=SOS+electronic, ComponentLink5Description=https://datasheet.octopart.com:443/CC0805KKX7R7BB105-Yageo-datasheet-147453679.pdf?src-supplier=Farnell, ComponentLink5URL=https://datasheet.octopart.com:443/CC0805KKX7R7BB105-Yageo-datasheet-147453679.pdf?src-supplier=Farnell, ComponentLink6Description=https://datasheet.octopart.com:443/CC0805KKX7R7BB105-Yageo-datasheet-181969634.pdf?src-supplier=Farnell, ComponentLink6URL=https://datasheet.octopart.com:443/CC0805KKX7R7BB105-Yageo-datasheet-181969634.pdf?src-supplier=Farnell, ComponentLink7Description=https://datasheet.octopart.com:443/CC0805KKX7R7BB105-Yageo-datasheet-62336348.pdf?src-supplier=element14+APAC, ComponentLink7URL=https://datasheet.octopart.com:443/CC0805KKX7R7BB105-Yageo-datasheet-62336348.pdf?src-supplier=element14+APAC, ComponentLink8Description=https://datasheet.octopart.com:443/CC0805KKX7R7BB105-Yageo-datasheet-166511530.pdf?src-supplier=Future+Electronics, ComponentLink8URL=https://datasheet.octopart.com:443/CC0805KKX7R7BB105-Yageo-datasheet-166511530.pdf?src-supplier=Future+Electronics, ComponentLink9Description=https://datasheet.octopart.com:443/CC0805KKX7R7BB105-Yageo-datasheet-137700082.pdf?src-supplier=Future+Electronics, ComponentLink9URL=https://datasheet.octopart.com:443/CC0805KKX7R7BB105-Yageo-datasheet-137700082.pdf?src-supplier=Future+Electronics, ComponentLink10Description=https://datasheet.octopart.com:443/CC0805KKX7R7BB105-Yageo-datasheet-137700084.pdf?src-supplier=Future+Electronics, ComponentLink10URL=https://datasheet.octopart.com:443/CC0805KKX7R7BB105-Yageo-datasheet-137700084.pdf?src-supplier=Future+Electronics, ComponentLink11Description=https://datasheet.octopart.com:443/CC0805KKX7R7BB105-Yageo-datasheet-27626582.pdf?src-supplier=Future+Electronics, ComponentLink11URL=https://datasheet.octopart.com:443/CC0805KKX7R7BB105-Yageo-datasheet-27626582.pdf?src-supplier=Future+Electronics, ComponentLink12Description=https://datasheet.octopart.com:443/CC0805KKX7R7BB105-Yageo-datasheet-15895757.pdf?src-supplier=Future+Electronics, ComponentLink12URL=https://datasheet.octopart.com:443/CC0805KKX7R7BB105-Yageo-datasheet-15895757.pdf?src-supplier=Future+Electronics, ComponentLink13Description=https://datasheet.octopart.com:443/CC0805KKX7R7BB105-Yageo-datasheet-12526321.pdf?src-supplier=Future+Electronics, ComponentLink13URL=https://datasheet.octopart.com:443/CC0805KKX7R7BB105-Yageo-datasheet-12526321.pdf?src-supplier=Future+Electronics, ComponentLink14Description=https://datasheet.octopart.com:443/CC0805KKX7R7BB105-Yageo-datasheet-10911834.pdf?src-supplier=Future+Electronics, ComponentLink14URL=https://datasheet.octopart.com:443/CC0805KKX7R7BB105-Yageo-datasheet-10911834.pdf?src-supplier=Future+Electronics, ComponentLink15Description=https://datasheet.octopart.com:443/CC0805KKX7R7BB105-Yageo-datasheet-8324442.pdf?src-supplier=Future+Electronics, ComponentLink15URL=https://datasheet.octopart.com:443/CC0805KKX7R7BB105-Yageo-datasheet-8324442.pdf?src-supplier=Future+Electronics, ComponentLink16Description=https://datasheet.octopart.com:443/CC0805KKX7R7BB105-Yageo-Group-datasheet-165992755.pdf?src-supplier=ODG+(Origin+Data+Global), ComponentLink16URL=https://datasheet.octopart.com:443/CC0805KKX7R7BB105-Yageo-Group-datasheet-165992755.pdf?src-supplier=ODG+(Origin+Data+Global), ComponentLink17Description=https://datasheet.octopart.com:443/CC0805KKX7R7BB105-Yageo-datasheet-151948686.pdf?src-supplier=TME, ComponentLink17URL=https://datasheet.octopart.com:443/CC0805KKX7R7BB105-Yageo-datasheet-151948686.pdf?src-supplier=TME, ComponentLink18Description=https://datasheet.octopart.com:443/CC0805KKX7R7BB105-Yageo-datasheet-8324192.pdf?src-supplier=TME, ComponentLink18URL=https://datasheet.octopart.com:443/CC0805KKX7R7BB105-Yageo-datasheet-8324192.pdf?src-supplier=TME, ComponentLink19Description=https://datasheet.octopart.com:443/CC0805KKX7R7BB105-Yageo-datasheet-120101875.pdf?src-supplier=Megastar, ComponentLink19URL=https://datasheet.octopart.com:443/CC0805KKX7R7BB105-Yageo-datasheet-120101875.pdf?src-supplier=Megastar, ComponentLink20Description=https://datasheet.octopart.com:443/CC0805KKX7R7BB105-Yageo-datasheet-8701427.pdf?src-supplier=element14, ComponentLink20URL=https://datasheet.octopart.com:443/CC0805KKX7R7BB105-Yageo-datasheet-8701427.pdf?src-supplier=element14, ComponentLink21Description=https://datasheet.octopart.com:443/CC0805KKX7R7BB105-Yageo-datasheet-499490.pdf?src-supplier=element14, ComponentLink21URL=https://datasheet.octopart.com:443/CC0805KKX7R7BB105-Yageo-datasheet-499490.pdf?src-supplier=element14, ComponentLink22Description=https://datasheet.octopart.com:443/CC0805KKX7R7BB105-Yageo-datasheet-5301394.pdf?src-supplier=element14, ComponentLink22URL=https://datasheet.octopart.com:443/CC0805KKX7R7BB105-Yageo-datasheet-5301394.pdf?src-supplier=element14, ComponentLink23Description=http://sigma.octopart.com:80/rohs_statement/Yageo-company-2.pdf?src-supplier=Compliance+Statements, ComponentLink23URL=http://sigma.octopart.com:80/rohs_statement/Yageo-company-2.pdf?src-supplier=Compliance+Statements, ComponentLink24Description=http://sigma.octopart.com:80/conflict_mineral_statement/Yageo-company-3.pdf?src-supplier=Compliance+Statements, ComponentLink24URL=http://sigma.octopart.com:80/conflict_mineral_statement/Yageo-company-3.pdf?src-supplier=Compliance+Statements, Depth=1.25mm, Halogen Free="Halogen Free", Height=1.25mm, Lead Free="Lead Free", Length=2mm, Library=Hexabitz, Lifecycle Status=Production, Manufacturer Part Number=CC0805KKX7R7BB105, Material=Ceramic, Mounting Technology="Surface Mount", Number of Terminals=2, Pins=2, Pricing="3000=0.0057, 12000=0.0055, 45000=0.0053, 90000=0.0052, 225000=0.005 (USD)", Radiation Hardening=No, REACH SVHC=Yes, RoHS=Compliant, Schedule B="8532240020, 8532240020|8532240020|8532240020|8532240020|8532240020|8532240020|8532240020|8532240020|8532240020|8532240020|8532240020|8532240020, 8532240020|8532240020|8532240020|8532240020|8532240020|8532240020|8532240020|8532240020|8532240020|8532240020|8532240020|8532240020|8532240020, 8532240020|8532240020|8532240020|8532240020|8532240020|8532240020|8532240020|8532240020|8532240020|8532240020|8532240020|8532240020|8532240020|8532240020", Stock=384000, Supplier="Future Electronics", Termination=SMD/SMT, Thickness=1.2446mm, Voltage Rating (DC)=16V, Width=1.25mm
D1 D3 D4 D5: library part CMP-1055-00401-1, "Schottky Power Rectifier, 2-Pin SOD-123, Pb-Free, Tape and Reel", Manufacturer="On Semiconductor", ComponentLink1Description="Manufacturer URL", ComponentLink1URL=http://www.onsemi.com/, ComponentLink2Description=Datasheet, ComponentLink2URL=http://www.onsemi.cn/pub_link/Collateral/MBR0540T1-D.PDF, ComponentLink3Description="Package Specification", ComponentLink3URL=http://www.onsemi.com/pub_link/Collateral/425-04.PDF, Configuration=Single, DatasheetVersion="Rev. 7", IFSM Max (A)=5.5, Mounting Technology="Surface Mount", PackageDescription="2-Pin SOD, Body 1.6 x 2.69 mm", PackageReference=SOD-123-2-425-04, PackageVersion="Rev. G, 10/2009", Packing="Tape and Reel", PartNumber=MBR0540T1G, RoHS=TRUE
D2: library part CMP-02520-000012-1, "LED RED 0603 SMD", Ambient Temperature Range High=+85°C, Ambient Temperature Range Low=-35°C, Colour=Red, Forward Current=20mA, Forward Voltage=2V, Manufacturer=Vishay, Manufacturer Part Number=VLMS1300-GS08, Package=6.541-5092.01-4, Power Dissipation=75mW, Reverse Voltage=5V, Temperature="-35°C to +85°C", Automotive=No, Category=Diode, ComponentLink2Description=Datasheet, ComponentLink2URL=http://www.vishay.com/docs/82437/vlmo1300.pdf, Device Class L1=Optoelectronics, Device Class L2=LEDs, Device Class L3=unset, Digikey Description="LED RED 0603 SMD", Height=1mm, Lead Free=Yes, Led Orientation="Top View", Luminous Intensity=54mcd, Mouser Description="Standard LEDs - SMD Super Red Clear Non-Diff", Octopart=https://octopart.com/vlms1300-gs08-vishay-21709201, Peak Emmision Wavelength=639nm, RoHS=TRUE, Temperature Range High=+85°C, Temperature Range Low=-35°C, Viewing Angle=130°, Wavelength=631nm
D6: "A 3V, 350W, bi-directional, standard capacitance, SOD323 pkg TVS Diode", Breakdown Voltage=4V, Clamping Voltage=10.9V, Leakage Current=125µA, Manufacturer=Bourns, Max Operating Temperature=150°C, Max Power Dissipation=400W, Max Surge Current=43A, Min Operating Temperature=-55°C, Operating Supply Voltage=3.3V, Power Line Protection=No, Supplier Part Number=CDSOD323-T03SCDKR-ND, Category="TVS Diodes", China RoHS=Compliant, ComponentLink1Description=https://datasheet.octopart.com:443/CDSOD323-T03SC-Bourns-datasheet-179966067.pdf?src-supplier=IHS, ComponentLink1URL=https://datasheet.octopart.com:443/CDSOD323-T03SC-Bourns-datasheet-179966067.pdf?src-supplier=IHS, ComponentLink2Description=https://datasheet.octopart.com:443/CDSOD323-T03SC-Bourns-datasheet-134530207.pdf?src-supplier=Electro+Sonic, ComponentLink2URL=https://datasheet.octopart.com:443/CDSOD323-T03SC-Bourns-datasheet-134530207.pdf?src-supplier=Electro+Sonic, ComponentLink3Description=https://datasheet.octopart.com:443/CDSOD323-T03SC-Bourns-datasheet-11734656.pdf?src-supplier=Burklin+Elektronik, ComponentLink3URL=https://datasheet.octopart.com:443/CDSOD323-T03SC-Bourns-datasheet-11734656.pdf?src-supplier=Burklin+Elektronik, ComponentLink4Description=https://datasheet.octopart.com:443/CDSOD323-T03SC-Bourns-datasheet-37162147.pdf?src-supplier=Farnell, ComponentLink4URL=https://datasheet.octopart.com:443/CDSOD323-T03SC-Bourns-datasheet-37162147.pdf?src-supplier=Farnell, ComponentLink5Description=https://datasheet.octopart.com:443/CDSOD323-T03SC-Bourns-datasheet-159777421.pdf?src-supplier=RS+(Formerly+Allied+Electronics), ComponentLink5URL=https://datasheet.octopart.com:443/CDSOD323-T03SC-Bourns-datasheet-159777421.pdf?src-supplier=RS+(Formerly+Allied+Electronics), ComponentLink6Description=http://sigma.octopart.com:80/conflict_mineral_statement/Bourns-company-36.pdf?src-supplier=Compliance+Statements, ComponentLink6URL=http://sigma.octopart.com:80/conflict_mineral_statement/Bourns-company-36.pdf?src-supplier=Compliance+Statements, Composition=Zener, Contact Plating=Tin, Depth=1.45mm, Direction=Bidirectional, Element Configuration=Single, Length=1.9mm, Library=Hexabitz, Lifecycle Status=Production, Manufacturer Part Number=CDSOD323-T03SC, Min Breakdown Voltage=4V, Mounting Technology="Surface Mount", Number of Bidirectional Channels=1, Number of Channels=1, Number of Elements=1, Number of Terminals=2, Peak Pulse Current=43A, Peak Pulse Power=400W, Peak Reverse Current=125µA, Pins=2, Polarity=Bidirectional, Pricing="1=0.69, 10=0.604, 100=0.418, 500=0.343, 1000=0.297 (USD)", Radiation Hardening=No, REACH SVHC=Yes, Reverse Standoff Voltage=3.3V, RoHS=Compliant, Stock=937, Supplier=DigiKey, Supplier 1=DigiKey, Supplier Part Number 1=CDSOD323-T03SCDKR-ND, Termination=SMD/SMT, Working Voltage=3.3V
FB1: "Ferrite Beads 0603 30ohms 1500mA Signal Line AEC-Q200", Case Code (Imperial)=0603, Case Code (Metric)=1608, Current Rating=1.5A, DC Resistance (DCR)=50mΩ, Manufacturer=TDK, Manufacturer Lifecycle Status=PRODUCTION, Manufacturer Part Number=MMZ1608Y300BTD25, Max Operating Temperature=125°C, Min Operating Temperature=-55°C, Ratings=AEC-Q200, Supplier Part Number=445-MMZ1608Y300BTD25DKR-ND, Supplier Part Number 1=445-MMZ1608Y300BTA00DKR-ND, Test Frequency=100MHz, Tolerance=25%, Case/Package=0603, Category="Ferrite Beads and Chips", ComponentLink1Description=https://datasheet.octopart.com:443/MMZ1608Y300BTD25-TDK-datasheet-181268448.pdf?src-supplier=IHS, ComponentLink1URL=https://datasheet.octopart.com:443/MMZ1608Y300BTD25-TDK-datasheet-181268448.pdf?src-supplier=IHS, ComponentLink2Description=https://datasheet.octopart.com:443/MMZ1608Y300BTD25-TDK-datasheet-151367874.pdf?src-supplier=TDK, ComponentLink2URL=https://datasheet.octopart.com:443/MMZ1608Y300BTD25-TDK-datasheet-151367874.pdf?src-supplier=TDK, Core Material=Ferrite, ESR=50mΩ, Height=800µm, Impedance=30Ω, Length=1.6mm, Library=Hexabitz, Lifecycle Status=Production, Max Current Rating=1.5A, Max DC Current=1.5A, Max Length=1.75mm, Max Width=950µm, Min Length=1.45mm, Min Width=650µm, Mounting Technology="Surface Mount", Number of Circuits=1, Number of Lines=1, Number of Terminals=2, Packaging="Tape & Reel (TR)", Pricing="1=0.1, 10=0.06, 25=0.052, 50=0.0468, 100=0.0419, 250=0.03612, 500=0.03214, 1000=0.02847 (USD)", REACH SVHC=Yes, RMS Current (Irms)=1.5A, RoHS=Compliant, Stock=11896, Supplier=DigiKey, Supplier 1=Digikey, Termination=SMD/SMT, Weight=2.012816mg, Width=800µm
GND1 GND2 GND3 GND4 GND7 GND8 GND9 GND10: library part HEXABIT_POWER_PORT_D
GND5: library part HEXABIT_POWER_PORT_D_300L
GND6: library part HEXABIT_POWER_PORT_D_300R
J1: library part CMP-02766-001743-1, "CONN HEADER VERT 3POS 2.54MM", Color=Black, Flammability Rating="UL94 V-0", Max Current Rating=7.6A, Max Operating Temperature=125°C, Max Voltage Rating (AC)=550V, Min Operating Temperature=-55°C, Package Quantity=1, Connector Type=Header, Contact Finish - Mating=GOLD, Contact Material=Bronze, Contact Mating Length=0.32inch, Contact Plating=Gold, Contact Shape=Square, Contact Type="Male Pin", Depth=2.54mm, Fastening Type=Pull, Gender=Male, Height=10.67mm, Housing Color=Black, Housing Material=Polyester, Insulation Color=Black, Insulation Material=PBT, Lead Free="Lead Free", Length=7.62mm, Mount="Through Hole", Number of Contacts=3, Number of Positions=3, Number of Rows=1, Orientation=Straight, Packaging=Bulk, Pitch=2.54mm, Radiation Hardening=No, REACH SVHC="No SVHC", RoHS Compliant=Yes, Series=TSW, Termination=Solder, Width=2.54mm
J2: library part CMP-17439-000221-2, "CONN HEADER SMD 2POS 1.25MM", Current Rating=1A, Housing Color=Natural, Max Operating Temperature=85°C, Min Operating Temperature=-25°C, Voltage Rating=50V, Contact Material="Copper, Tin", Contact Plating=Tin, Height=4.05mm, Housing Material=Nylon, Lead Free="Lead Free", Lead Pitch=1.25mm, NexarPartId=289277, Number of Contacts=2, Number of Positions=2, Number of Rows=1, Orientation=Straight, Packaging="Cut Tape", Pitch=1.25mm, REACH SVHC="No SVHC", RoHS=Compliant, Termination=SMD/SMT, Voltage Rating (AC)=50V, Wire/Cable Gauge=26AWG
J3: library part CMP-17439-000005-1, "CONN HEADER SMD 2POS 2MM", Current Rating=2A, Manufacturer=JST, Package=0, Temperature="-25°C to +85°C", Temperature Range High=+85°C, Temperature Range Low=-25°C, Voltage Rating=100V, Automotive=No, Category=Conn, ComponentLink2Description=Datasheet, ComponentLink2URL=http://www.jst-mfg.com/product/pdf/eng/ePH.pdf, Conn Gender=Male, Conn Orientation=Vertical, Contact Material=Tin,Copper, Device Class L1=Connectors, Device Class L2="Headers and Wire Housings", Device Class L3=unset, Digikey Description="CONN HEADER SMD 2POS 2MM", Height=6.65mm, Lead Free=Yes, Manufacturer Part Number=B2B-PH-SM4-TBT(LF)(SN), Number of Contacts=2, Number of Rows=1, Octopart=https://octopart.com/b2b-ph-sm4-tbt%28lf%29%28sn%29-jst-7877930, Pitch=2mm, RoHS=TRUE
L1: library part CMP-06042-003344-1, "Wire Wound Ferrite Inductor for General Circuits 47μH ±5% 10.4Ω 55mA 1206", Case Code (Imperial)=1206, Case Code (Metric)=3216, Current Rating=55mA, DC Resistance (DCR)=8R, Inductance=47uH, Max Operating Temperature=85°C, Min Operating Temperature=-40°C, Package Quantity=2000, Resistor Type=Wirewound, Self Resonant Frequency=10MHz, Test Frequency=1MHz, Tolerance=5%, Case/Package=1206, Core Material=Ferrite, DC Current=55mA, Depth=1.8mm, Height=1.8mm, Height - Seated (Max)=0.079inch, Length=0.126inch, Max DC Current=55mA, Military Standard=Not, Mount="Surface Mount", Packaging="Tape and Reel", Q Factor=40, Radiation Hardening=No, Shielding=Unshielded, Termination=SMD/SMT, Weight=0.001023oz, Width=0.063inch
LED1: "LED Uni-Color Super Red 639nm 2-Pin Chip 0603(1608Metric) T/R", Case Code (Imperial)=0603, Case Code (Metric)=1608, Color=Red, Forward Current=20mA, Forward Voltage=2V, Manufacturer="Vishay Semiconductors", Max Operating Temperature=85°C, Min Operating Temperature=-35°C, Package Quantity=1, Power Rating=75mW, Supplier Part Number=VLMS1300-GS08DKR-ND, Case/Package=0603, Category=LEDs, ComponentLink1Description=https://datasheet.ciiva.com/26322/vlmo1300-26322153.pdf?src-supplier=Element14, ComponentLink1URL=https://datasheet.ciiva.com/26322/vlmo1300-26322153.pdf?src-supplier=Element14, ComponentLink2Description=https://datasheet.ciiva.com/8028/vlmo1300-8028047.pdf?src-supplier=Element14, ComponentLink2URL=https://datasheet.ciiva.com/8028/vlmo1300-8028047.pdf?src-supplier=Element14, ComponentLink3Description=https://datasheet.ciiva.com/9333/vlmo1300-9333743.pdf?src-supplier=Avnet, ComponentLink3URL=https://datasheet.ciiva.com/9333/vlmo1300-9333743.pdf?src-supplier=Avnet, ComponentLink4Description=https://datasheet.ciiva.com/16510/vlmo1300-16510985.pdf?src-supplier=Future+Electronics, ComponentLink4URL=https://datasheet.ciiva.com/16510/vlmo1300-16510985.pdf?src-supplier=Future+Electronics, ComponentLink5Description=https://datasheet.ciiva.com/2114/vlmo1300-2114930.pdf?src-supplier=Digikey, ComponentLink5URL=https://datasheet.ciiva.com/2114/vlmo1300-2114930.pdf?src-supplier=Digikey, ComponentLink6Description=https://datasheet.ciiva.com/2114/vlmo1300-2114931.pdf?src-supplier=Digikey, ComponentLink6URL=https://datasheet.ciiva.com/2114/vlmo1300-2114931.pdf?src-supplier=Digikey, ComponentLink7Description=https://datasheet.ciiva.com/2114/vlmo1300-2114929.pdf?src-supplier=Digikey, ComponentLink7URL=https://datasheet.ciiva.com/2114/vlmo1300-2114929.pdf?src-supplier=Digikey, Dominant Wavelength=631nm, Height=0.8mm, Illumination Color=Red, Lead Free="Lead Free", Length=1.6mm, Lens Style=Rectangular,Clear, Library=Hexabitz, Luminous Intensity=54mcd, Manufacturer Part Number=VLMS1300-GS08, Mounting Technology="Surface Mount", Number of LEDs=1, Packaging="Tape and Reel", Pricing="1=0.21, 10=0.143, 100=0.0998, 500=0.07982, 1000=0.07322 (USD)", Radiation Hardening=No, Reach SVHC Compliant=Unknown, RoHS=Yes, RoHS Compliant=Yes, Series=CHipLED, Stock=56745, Supplier=Digikey, Supplier 1=Digikey, Supplier Part Number 1=VLMS1300-GS08DKR-ND, Test Current=20mA, Viewing Angle=130°, Wavelength=631nm, Width=0.8mm
Q1 Q2: library part CMP-2000-04929-2, "MOSFET N-CH 60V 115MA SOT23-3", Case/Package=SOT-23, Continuous Drain Current (ID)=115mA, Drain to Source Breakdown Voltage=70V, Drain to Source Resistance=7.5R, Drain to Source Voltage (Vdss)=60V, Gate to Source Voltage (Vgs)=20V, Input Capacitance=50pF, Max Operating Temperature=150°C, Max Power Dissipation=300mW, Min Operating Temperature=-55°C, Package Quantity=3000, Power Dissipation=540mW, Threshold Voltage=2.5V, Contact Plating=Tin, Current Rating=115mA, Dual Supply Voltage=60V, Element Configuration=Single, Fall Time=5.6ns, Height=1mm, Lead Free="Lead Free", Length=2.9mm, Mount="Surface Mount", Nominal Vgs=2.5V, Number of Channels=1, Number of Elements=1, Number of Pins=3, On-State Resistance=7.5R, Packaging="Tape and Reel", Radiation Hardening=No, Rds On Max=7.5R, REACH SVHC="No SVHC", Rise Time=3ns, Termination=SMD/SMT, Turn-Off Delay Time=11ns, Turn-On Delay Time=7ns, Voltage=60V, Voltage Rating (DC)=60V, Weight=0.000282oz, Width=1.3mm
R1: library part CMP-250906-149647-1, "RES Thin Film,  20kΩ, 1%, 0.063W, 50ppm/°C, 0402"
R2 R9 R10: library part CMP-26527-002183-1, "1kΩ ±1% 0.1W 0402 High Power Anti-Sulfur Thin Film Chip Resistor", Max Operating Temperature=155°C, Min Operating Temperature=-55°C, Tolerance=1%, Mount="Surface Mount"